# EAGLE board Arm Board V4 (EAGLE 6.5.0)
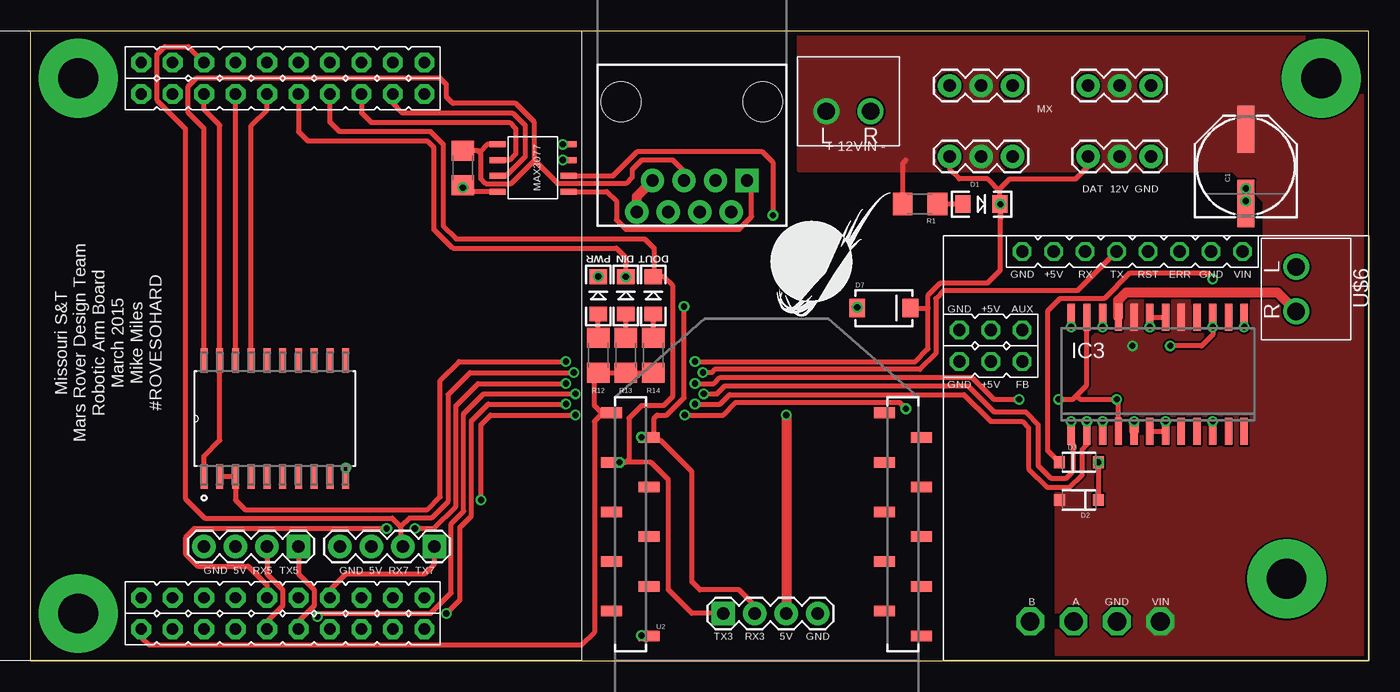
[diagram p0: board, top side]
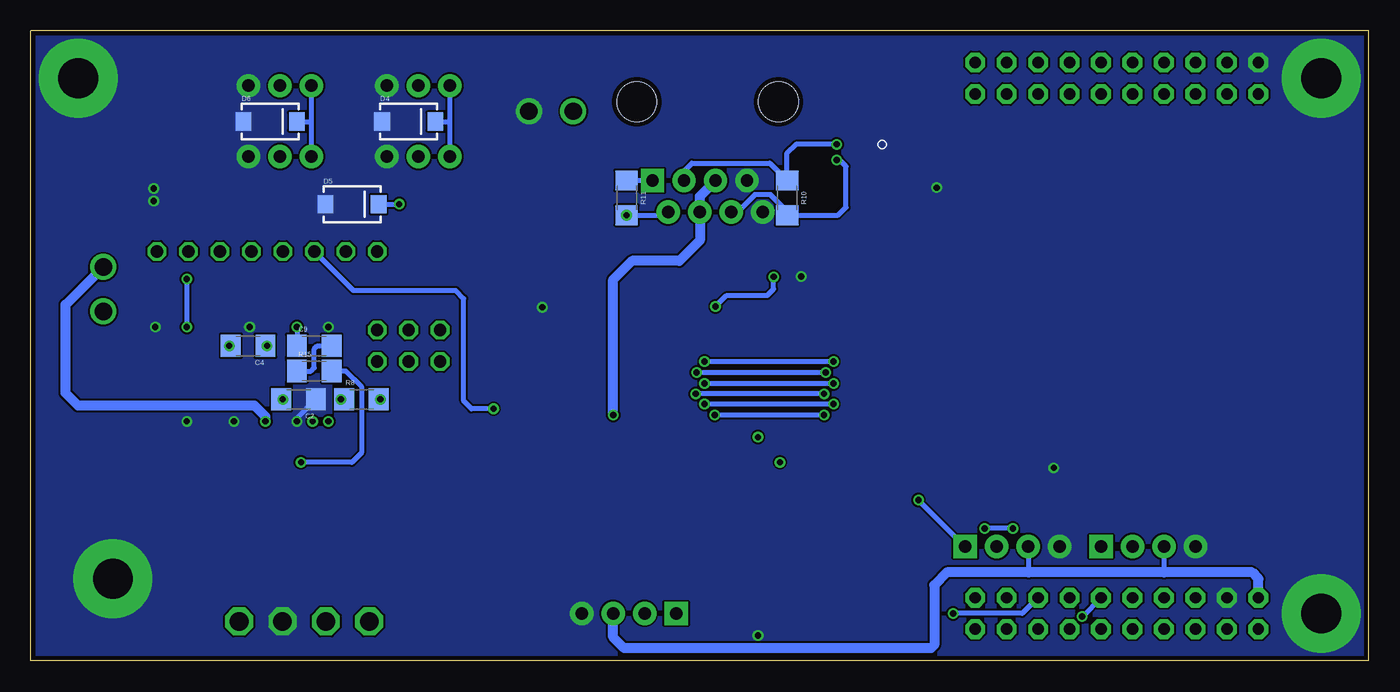
[diagram p1: board, bottom side, seen from below]

Size 107.95 x 50.8 mm. Coordinates in mm from the lower left corner, seen from the top.
Outline: 107.95,0 107.95,50.8 0,50.8 0,0 107.95,0
Copper layers (1*16): Top 0.0356mm / dielectric 1.5011mm / Bottom 0.0356mm
Design rules "LaenPCBOrder": minimum track width 6mil, minimum drill 13mil, track to track 6mil, track to pad 6mil, pad to pad 6mil, via to via 6mil, smd to smd 6mil, copper to edge 15mil, drill to drill 6mil, minimum pad ring 7mil, minimum via ring 7mil, stop-mask expansion 3mil, vias tented up to drill 0mil, thermal gap 10mil
Net classes: 1 USB: drill 0.406 mm, clearance 0.203 mm to class 0, clearance 0.406 mm; 3 usbvcc: width 0.61 mm, drill 0.508 mm, clearance 0.203 mm to class 0, clearance 0.254 mm
tRestrict: area 15.7,26.7 to 18.2,29.2

## Footprints (pad centres in the part's own frame; a part is rotated, then mirrored left to right if it is on the bottom)
PANASONIC_E = smd 3.8 x 1.4: + 3,0; - -3,0
1206 = smd 1.6 x 1.8: 1 -1.4,0; 2 1.4,0
LED-1206 = smd 1.2 x 1.4: A -1.5,0; C 1.5,0
SOD-123 = smd 0.9 x 0.95: A 1.575,0; C -1.575,0
SMA-DIODE = smd 1.27 x 1.47: A -2.15,0; C 2.15,0
SO24 = smd 0.6 x 2.2: 1 -6.985,-4.6; 2 -5.715,-4.6; 3 -4.445,-4.6; 4 -3.175,-4.6; 5 -1.905,-4.6; 6 -0.635,-4.6; 7 0.635,-4.6; 8 1.905,-4.6; 9 3.175,-4.6; 10 4.445,-4.6; 11 5.715,-4.6; 12 6.985,-4.6; 13 6.985,4.6; 14 5.715,4.6; 15 4.445,4.6; 16 3.175,4.6; 17 1.905,4.6; 18 0.635,4.6; 19 -0.635,4.6; 20 -1.905,4.6; 21 -3.175,4.6; 22 -4.445,4.6; 23 -5.715,4.6; 24 -6.985,4.6
1X04 = drill 1.016 pad 1.88 square: 1 0,0 | drill 1.016 pad 1.88: 2 2.54,0; 3 5.08,0; 4 7.62,0
DYNAMIXEL-1X03 = drill 1.016 pad 1.88: DDATA 5.08,0; GND 0,0; VIN 2.54,0
LAUNCHPAD-XL = drill 0.914 pad 1.6 octagon: 3.3V 30.48,2.54; GND1 33.02,5.08; GND2 30.48,48.26; PA2 53.34,48.26; PA3 50.8,48.26; PA4 48.26,48.26; PA5 48.26,2.54; PA6 50.8,2.54; PA7 53.34,2.54; PB0 35.56,2.54; PB1 38.1,2.54; PB2 33.02,48.26; PB3 35.56,45.72; PB4 45.72,2.54; PB5 33.02,2.54; PB6 45.72,48.26; PB7 43.18,48.26; PC4 38.1,45.72; PC5 40.64,45.72; PC6 43.18,45.72; PC7 45.72,45.72; PD0 35.56,5.08; PD1 38.1,5.08; PD2 40.64,5.08; PD3 43.18,5.08; PD6 48.26,45.72; PD7 50.8,45.72; PE0 35.56,48.26; PE1 45.72,5.08; PE2 48.26,5.08; PE3 50.8,5.08; PE4 40.64,2.54; PE5 43.18,2.54; PF0 38.1,48.26; PF1 53.34,5.08; PF2 30.48,45.72; PF3 33.02,45.72; PF4 53.34,45.72; RST 40.64,48.26; VBUS 30.48,5.08
STANDOFF-ELECTRICAL = drill 3.2 pad 6.35: P1 0,0
SOIC127P1030X265-20N = smd 1.981 x 0.559: 1 -4.674,5.715; 2 -4.674,4.445; 3 -4.674,3.175; 4 -4.674,1.905; 5 -4.674,0.635; 6 -4.674,-0.635; 7 -4.674,-1.905; 8 -4.674,-3.175; 9 -4.674,-4.445; 10 -4.674,-5.715; 11 4.674,-5.715; 12 4.674,-4.445; 13 4.674,-3.175; 14 4.674,-1.905; 15 4.674,-0.635; 16 4.674,0.635; 17 4.674,1.905; 18 4.674,3.175; 19 4.674,4.445; 20 4.674,5.715
XBEE-SMD = smd 1.7 x 0.85: 1 -12.5,20; 2 -9.5,18; 3 -12.5,16; 4 -9.5,14; 5 -12.5,12; 6 -9.5,10; 7 -12.5,8; 8 -9.5,6; 9 -12.5,4; 10 -9.5,2; 11 12.5,2; 12 9.5,4; 13 12.5,6; 14 9.5,8; 15 12.5,10; 16 9.5,12; 17 12.5,14; 18 9.5,16; 19 12.5,18; 20 9.5,20
TORXIS_BREAKOUT = drill 1 octagon: +5V@1 26.67,30.48; +5V@2 24.13,30.48; +5V_OUT 33.02,25.4; AUX 26.67,27.94; ERR 33.02,15.24; FB 24.13,27.94; GND@2 24.13,33.02; GND@3 26.67,33.02; GND@4 33.02,27.94; GND@5 33.02,12.7; RST 33.02,17.78; RX 33.02,22.86; TX 33.02,20.32; VIN_OUT 33.02,10.16 | drill 1.5 octagon: A 3.172,23.801; B 3.172,27.301; GND@1 3.172,20.301; VIN 3.172,16.801
RJ45-8 = drill 1 pad 1.88 square: 1 -4.445,6.35 | drill 1 pad 1.88: 2 -3.175,8.89; 3 -1.905,6.35; 4 -0.635,8.89; 5 0.635,6.35; 6 1.905,8.89; 7 3.175,6.35; 8 4.445,8.89 | hole 3.2: -5.715,0; 5.715,0
MAX3070E = smd 0.49 x 1.3: A -1.905,2.857; B -0.635,2.857; DI 0.635,-2.857; GND 1.905,-2.857; RO -0.635,-2.857; VCC -1.905,-2.857; Y 1.905,2.857; Z 0.635,2.857
691321100002 = drill 1.4: L -1.79,0; R 1.79,0

## Placement (x,y rotation side)
C1  330uF  [PANASONIC_E]  98.04,39.88 90 top
C2  5.6nF  [1206]  86.36,21.08 180 bottom
C4  220nF  [1206]  90.42,25.4 180 bottom
C9  10nF  [1206]  85.09,25.4 0 bottom
C12  .1uF  [1206]  34.86,39.75 270 top
D1  RED  [LED-1206]  76.71,36.83 0 top
D2  1N4148  [SOD-123]  84.58,12.95 180 top
D3  1N4148  [SOD-123]  84.58,16 0 top
D4  SMAJ5920  [SMA-DIODE]  77.47,43.5 0 bottom
D5  SMAJ5920  [SMA-DIODE]  82.04,36.83 0 bottom
D6  SMAJ5920  [SMA-DIODE]  88.65,43.5 0 bottom
D7  SMAJ5920  [SMA-DIODE]  68.83,28.45 0 top
IC3  L6206D  [SO24]  90.93,23.11 0 top
JP1  [1X04]  55.88,3.81 0 top
JP2  [1X04]  32.54,9.21 180 top
JP3  [1X04]  21.59,9.21 180 top
JP9  DYNAMIXEL-1X03  [DYNAMIXEL-1X03]  79.22,46.39 180 top
JP10  DYNAMIXEL-1X03  [DYNAMIXEL-1X03]  90.39,46.39 180 top
JP11  DYNAMIXEL-1X03  [DYNAMIXEL-1X03]  79.22,40.67 180 top
JP12  DYNAMIXEL-1X03  [DYNAMIXEL-1X03]  90.39,40.67 180 top
LED1  RED  [LED-1206]  45.78,29.46 90 top
LED2  RED  [LED-1206]  48.01,29.46 90 top
LED3  GREEN  [LED-1206]  50.23,29.46 90 top
P1  STELLARIS-LAUNCHPADSTELLARIS-LAUNCHPAD-XL  [LAUNCHPAD-XL]  -21.59,0 0 top
R1  1k  [1206]  71.75,36.83 180 top
R8  100k  [1206]  81.28,21.08 0 bottom
R10  120 Ohm  [1206]  46.93,37.34 270 bottom
R11  120 Ohm  [1206]  59.88,37.34 90 bottom
R12  1k  [1206]  45.78,24.64 270 top
R13  1k  [1206]  48.01,24.64 90 top
R14  1k  [1206]  50.23,24.64 90 top
R15  100  [1206]  85.09,23.37 0 bottom
S1  STANDOFF_ELECTRICAL  [STANDOFF-ELECTRICAL]  3.81,3.81 0 top
S2  STANDOFF_ELECTRICAL  [STANDOFF-ELECTRICAL]  3.81,46.99 0 top
S3  STANDOFF_ELECTRICAL  [STANDOFF-ELECTRICAL]  101.35,6.6 0 bottom
S4  STANDOFF_ELECTRICAL  [STANDOFF-ELECTRICAL]  104.14,46.99 0 top
U1  SN74LS241DW  [SOIC127P1030X265-20N]  19.68,19.53 90 top
U2  XBEE-1B3  [XBEE-SMD]  59.37,0 0 top
U$1  TORXIS_BREAKOUT  [TORXIS_BREAKOUT]  107.95,0 90 top
U$3  RJ45-8PTH  [RJ45-8]  53.34,45.09 180 top
U$4  MAX3077  [MAX3070E]  40.51,39.75 270 top
U$6  H_WR-TBL_321*0002VERT  [691321100002]  102.11,29.97 270 top
U$7  H_WR-TBL_321*0002VERT  [691321100002]  65.98,44.32 0 top

## Library data of the parts
C1 C12 = SparkFun-Capacitors
C2 C4 C9 R10-R14 = SparkFun-Passives
D1 LED1 LED2 = SparkFun-LED
D2 D3 = SparkFun-DiscreteSemi
D4-D7 = SparkFun-DiscreteSemi; PROD_ID: DIO-08053
IC3 = L6206D
JP1-JP3 = SparkFun-Connectors
JP9-JP12 U$1 = MRDT-2015-Arm
LED3 = SparkFun-LED; PROD_ID: DIO-00862
P1 = StellarisLaunchPad_Fred
R1 R8 R15 = SparkFun-Resistors
S1-S4 = SparkFun-Electromechanical
U1 = 74LS241; MPN: SN74LS241DW; OC_FARNELL: 1739687; OC_NEWARK: 50R6539; PACKAGE: SOIC-20; SUPPLIER: Texas Instruments
U2 = SparkFun
U$3 = SparkFun-Connectors; PROD_ID: CONN-08506; VALUE: RJ45
U$4 = MAX3077
U$6 U$7 = MRDT-2015-PowerBoard; DIGIKEY_PN: 732-2763-ND

## Nets
+3V3: P1.3.3V R12.2 R13.1 R14.1 U2.1
+5V: C12.1 JP1.3 JP2.3 JP3.3 P1.VBUS U1.20 U$3.4 U$3.5 U$4.VCC
+12V: C1.+ C4.1 D2.A IC3.17 IC3.20 JP9.VIN JP10.VIN JP11.VIN JP12.VIN R1.2 U$1.VIN U$7.L
A1: IC3.5 U$6.L
A2: IC3.21 U$6.R
CTS: U2.12
DC_1: P1.PB3 U1.1 U1.19
DDATA_1: D1.C D4.C D5.C D6.C D7.C JP9.DDATA JP10.DDATA JP11.DDATA JP12.DDATA U1.2 U1.3
DIO0: U2.20
DIO1: U2.19
DIO2: U2.18
DIO3: U2.17
DIO4: U2.11
DIO5: U2.15
DIO9: U2.13
DIO11: U2.7
DIO12: U2.4
DTR: U2.9
EN_A: P1.PD2 R8.2
GND: C1.- C2.1 C12.2 D4.A D5.A D6.A D7.A IC3.3 IC3.6 IC3.7 IC3.10 IC3.13 IC3.18 IC3.19 IC3.24 JP1.4 JP2.4 JP3.4 JP9.GND JP10.GND JP11.GND JP12.GND LED1.C P1.GND1 P1.GND2 S1.P1 S2.P1 S3.P1 S4.P1 U1.10 U2.10 U$1.GND@1 U$3.7 U$3.8 U$4.GND U$7.R
IN1_A: IC3.1 P1.PD3
IN2_A: IC3.2 P1.PE2
INT1_XM: P1.PB1
INT2_XM: P1.PB0
INT_G: P1.PB5
LA_ENC: P1.PE3
N$4: LED2.A R13.2
N$6: LED3.A R14.2
N$13: D1.A R1.1
N$17: D2.C D3.A R15.2
N$18: C9.2 R15.1
N$19: C9.1 IC3.22
N$38: LED1.A R12.1
OCD_A: C2.2 IC3.4 IC3.23 R8.1
RES1: U2.8
RES2: U2.14
RSSI: U2.6
RST: P1.RST
RTS: U2.16
RX+: R10.1 U$3.3 U$4.A
RX-: R10.2 U$3.6 U$4.B
RX_1: P1.PC4 U1.18
RX_2: P1.PD6 U$4.RO
RX_3: JP1.2 LED2.C P1.PC6 U2.2
RX_5: JP3.2 P1.PE4
RX_7: JP2.2 P1.PE0 U$1.TX
SCL: P1.PA6
SDA: P1.PA7
TX+: R11.2 U$3.1 U$4.Y
TX-: R11.1 U$3.2 U$4.Z
TX_1: P1.PC5 U1.17
TX_2: P1.PD7 U$4.DI
TX_3: JP1.1 LED3.C P1.PC7 U2.3
TX_5: JP3.1 P1.PE5
TX_7: JP2.1 P1.PE1 U$1.RX
VBOOT: C4.2 D3.C IC3.15
XRESET: U2.5

## Tracks (layer width: path | path; a pad name or v marks a point on that pad's centre or on a via)
+3V3
  Top 0.406: R14.1 R13.1 R12.2 45.47,22.92 45.47,20.57 46.04,20 46.16,20 | P1.3.3V 8.89,1.91 9.53,1.27 44.45,1.27 45.47,2.29 45.47,19.3 46.16,20 | U2.1 46.16,20
+5V  (via drill 0.5)
  Top 0.406: U1.20 13.97,42.93 12.7,44.2 12.7,46.35 13.34,46.99 33.02,46.99 33.53,46.48 33.53,45.47 34.04,44.96 39.12,44.96 40.64,43.43 40.64,40.39 | U$4.VCC 36.83,41.66 36.2,41.02 | 36.2,41.02 36.32,40.89 36.32,38.86 36.7,38.48 38.73,38.48 40.64,40.39 | 36.2,41.02 36.07,41.15 C12.1 | 40.64,40.39 42.55,38.48 48.01,38.48 48.51,38.99 48.51,39.62 49.28,40.39 51.82,40.39 52.7,39.5 U$3.5
  Top 0.813: v60.96,19.81 JP1.3
  Bottom 0.406: JP3.3 16.51,7.11 | 27.43,7.11 27.46,7.14 JP2.3 27.43,9.18 | 27.43,9.24 27.43,9.18 | 27.43,9.14 27.43,9.18
  Bottom 0.813: P1.VBUS 8.89,6.6 9.4,7.11 16.51,7.11 27.43,7.11 34.04,7.11 35.05,6.1 35.05,1.27 35.31,1.02 60.07,1.02 60.96,1.91 JP1.3 | v60.96,19.81 60.96,30.73 59.44,32.26 55.63,32.26 53.98,33.91 U$3.4 53.98,37.47 U$3.5
+12V  (via drill 0.5)
  Top 0.406: R1.2 70.36,40.13 70.61,40.39
  Bottom 0.406: C4.1 v88.9,25.4
  pour Top (no thermals): 107.95,0 107.95,50.8 61.98,50.8 61.98,39.62 97.03,39.62 99.57,37.08 99.57,28.96 88.65,28.96 82.8,23.11 82.8,0.51
A1  (via drill 0.5)
  Top 0.813: v89.03,19.3 IC3.5
  Bottom 0.813: 105.16,28.7 105.16,21.59 104.14,20.57 89.92,20.57 89.03,19.68 v89.03,19.3 | 105.16,28.7 105.16,28.71 | U$6.L 105.16,28.7
A2
  Top 0.813: IC3.21 87.76,29.08 88.39,29.72 100.58,29.72 | 100.58,29.72 100.6,29.72 | U$6.R 102.11,28.19 100.58,29.72
DC_1
  Top 0.406: U1.1 13.97,16.51 15.24,17.78 U1.19 15.24,43.18 13.97,44.45 P1.PB3
DDATA_1  (via drill 0.5)
  Top 0.406: 16.39,14.85 16.51,14.73 16.51,12.95 17.27,12.19 32,12.19 33.02,13.21 33.02,22.61 34.54,24.13 v43.18,24.13 | v53.59,24.13 71.37,24.13 72.39,25.15 72.39,28.45 | 16.39,14.85 U1.3 | 16.39,14.85 U1.2 | 78.21,37.87 D1.C 78.23,37.31 v78.23,36.83 | 78.21,37.87 77.22,38.86 74.93,38.86 74.17,39.62 74.17,40.64 JP11.DDATA | 78.21,37.87 78.21,38.08 78.99,38.86 84.33,38.86 85.34,39.88 85.34,40.64 JP12.DDATA | 72.39,28.45 72.39,29.46 73.41,30.48 77.22,30.48 78.23,31.5 v78.23,36.83 | D7.C 72.39,28.45 | v78.23,36.83 78.23,35.56
  Bottom 0.406: v43.18,24.13 v53.59,24.13 | JP11.DDATA 74.14,43.5 | 74.14,43.5 JP9.DDATA | JP12.DDATA 85.31,43.5 | 85.31,43.5 JP10.DDATA | D4.C 74.14,43.5 | D6.C 85.31,43.5 | D5.C v78.23,36.83
EN_A  (via drill 0.5)
  Top 0.406: 19.05,5.33 P1.PD2 19.05,6.1 17.53,7.62 13.46,7.62 12.45,8.64 12.45,9.91 13.21,10.67 v28.7,10.67 | v30.99,10.67 32.51,10.67 34.29,12.45 34.29,20.57 36.07,22.35 v43.18,22.35 | v53.59,22.35 55.12,22.35 55.63,22.86 75.95,22.86 77.72,21.08 v79.76,21.08
  Bottom 0.406: v28.7,10.67 v30.99,10.67 | v43.18,22.35 v53.59,22.35 | R8.2 v79.76,21.08
GND  (via drill 0.5)
  Top 0.406: 50.01,2 U2.10 49.9,2.03 v49.28,2.03 | U$4.GND 35.37,37.85 C12.2 v34.86,38.16 | v25.4,15.56 U1.10 | IC3.6 IC3.7 v91.57,19.3 91.57,19.43 | IC3.3 v86.49,19.3 | v97.92,26.92 IC3.13 | IC3.24 v83.95,26.92 | LED1.C v45.78,30.99 | v90.3,26.92 IC3.19 IC3.18 | IC3.10 v95.38,19.3 | C1.- v98.04,38.1 | D7.A v66.67,28.51
  Top 0.813: U$3.8 48.9,37.47 U$3.7
  Bottom 0.406: v86.49,19.3 86.49,19.55 C2.1
  other vias: 98.04,37.08
  pour Bottom (no thermals): 0,7.3 0,0 7.62,0 7.62,7.3
  pour Bottom (no thermals): 0,50.8 0,43.5 7.62,43.5 7.62,50.8
  pour Bottom (no thermals): 100.65,50.8 100.65,43.5 107.95,43.5 107.95,50.8
  pour Bottom (no thermals): 0,0 107.95,0 107.95,50.8 0,50.8
IN1_A  (via drill 0.5)
  Top 0.406: v23.11,3.56 23.37,3.81 32.26,3.81 33.91,5.46 33.91,11.05 34.92,12.06 34.92,19.94 36.51,21.53 v43.94,21.53 | v54.29,21.53 55.37,21.53 56.01,22.16 75.63,22.16 77.72,20.07 80.33,20.07 80.33,20 81.28,19.05 81.28,15.75 82.3,14.73 83.57,14.73 84.07,15.24 84.07,17.53 83.95,17.65 IC3.1 v83.95,19.3
  Bottom 0.406: P1.PD3 v23.11,3.56 | v43.94,21.53 v54.29,21.53
IN2_A  (via drill 0.5)
  Top 0.406: v43.18,20.7 36.89,20.7 35.56,19.37 35.56,11.68 34.61,10.73 34.61,4.89 v33.53,3.81 | v53.59,20.7 55.63,20.7 56.39,21.46 75.31,21.46 77.47,19.3 80.01,19.3 80.52,18.8 80.52,15.49 82.04,13.97 83.82,13.97 84.84,14.99 84.84,17.02 85.22,17.4 IC3.2 v85.22,19.3
  Bottom 0.406: P1.PE2 27.94,3.81 v33.53,3.81 | v43.18,20.7 v53.59,20.7
N$4
  Top 0.406: R13.2 LED2.A
N$6
  Top 0.406: R14.2 LED3.A
N$13
  Top 0.406: D1.A R1.1
N$17  (via drill 0.5)
  Top 0.406: D3.A D2.C
  Bottom 0.406: R15.2 82.55,23.37 81.28,22.1 81.28,16.76 82.04,16 D3.A
  other vias: 86.16,16
N$18
  Bottom 0.406: R15.1 85.34,23.37 85.09,23.62 85.09,25.15 84.84,25.4 C9.2
N$19  (via drill 0.5)
  Top 0.406: IC3.22 v86.49,26.92
  Bottom 0.406: v86.49,26.92 C9.1
N$38
  Top 0.406: R12.1 LED1.A
OCD_A  (via drill 0.5)  (1 unrouted)
  Top 0.406: 84.39,21.4 84.07,21.08 v82.93,21.08 | 84.39,21.4 85.22,22.23 IC3.23 | 84.39,21.4 84.71,21.08 v87.63,21.08 C2.2 IC3.4
  Bottom 0.406: R8.1 v82.93,21.08
RX+  (via drill 0.5)
  Top 0.406: U$4.A v42.93,41.66
  Bottom 0.406: U$3.3 55.24,39.5 54.61,40.13 48.32,40.13 R10.1 46.93,40.96 46.23,41.66 v42.93,41.66
RX-  (via drill 0.5)
  Top 0.406: v42.93,40.39 U$4.B
  Bottom 0.406: v42.93,40.39 42.67,40.39 42.16,39.88 42.16,36.58 42.8,35.94 R10.2 46.93,36.26 48.26,37.59 49.53,37.59 50.93,36.2 U$3.6
RX_1
  Top 0.406: U1.18 P1.PC4
RX_2
  Top 0.406: P1.PD6 26.67,44.2 27.43,43.43 38.61,43.43 39.12,42.93 39.12,40.89 38.61,40.39 U$4.RO
RX_3  (via drill 0.5)
  Top 0.406: JP1.2 58.42,4.45 57.15,5.71 53.98,5.71 53.34,6.35 53.34,15.24 50.8,17.78 50.09,17.78 U2.2 49.65,17.78 49.53,17.78 v49.28,18.03 | P1.PC6 21.59,42.67 22.35,41.91 32,41.91 32.51,41.4 32.51,34.8 34.04,33.27 47.24,33.27 48.01,32.51 48.01,32 LED2.C | 49.78,18.03 v49.28,18.03 | v49.28,18.03 50.29,18.03 50.29,19.56 50.55,19.81 51.31,19.81 52.7,21.21 v52.7,28.57
  Bottom 0.406: v52.7,28.57 51.82,29.46 48.51,29.46 48.01,29.97 LED2.C
  other vias: 48.01,30.96
RX_5
  Top 0.406: JP3.2 19.05,6.99 20.32,5.71 20.32,4.45 19.05,3.17 P1.PE4
RX_7  (via drill 0.5)
  Top 0.406: 29.84,10.79 30.54,11.49 32.32,11.49 33.66,12.83 33.66,21.46 35.43,23.24 v43.81,23.24 | 29.84,10.79 29.84,9.37 JP2.2 | v54.23,23.24 54.93,23.24 55.18,23.5 71.75,23.5 73.03,24.77 73.03,29.21 73.66,29.84 84.45,29.84 U$1.TX | P1.PE0 12.7,49.53 10.79,49.53 10.16,48.9 10.16,45.21 12.45,42.93 12.45,13.08 14.03,11.49 29.15,11.49 29.84,10.79
  Bottom 0.406: v43.81,23.24 v54.23,23.24
TX+
  Top 0.406: U$4.Y 46.48,37.85 47.24,37.08 47.24,35.56 48.01,34.8 57.15,34.8 58.17,35.81 58.17,38.35 U$3.1
  Bottom 0.406: R11.2 U$3.1
TX-  (via drill 0.5)
  Top 0.406: U$4.Z 46.99,39.12 48.96,41.08 58.99,41.08 59.88,40.2 R11.1
  Bottom 0.406: R11.1 56.77,35.94 U$3.2
  other vias: 59.88,35.94
TX_1
  Top 0.406: P1.PC5 19.05,44.45 17.78,43.18 U1.17
TX_2
  Top 0.406: U$4.DI 38.35,39.12 39.88,40.64 39.88,43.18 38.86,44.2 29.97,44.2 29.21,44.96 P1.PD7
TX_3  (via drill 0.5)
  Top 0.406: JP1.1 53.34,3.81 51.44,5.71 51.44,14.61 50.04,16 48.01,16 | P1.PC7 24.13,43.43 24.89,42.67 32.26,42.67 33.27,41.66 33.27,35.05 34.29,34.04 49.53,34.04 50.29,33.27 50.29,31.03 LED3.C 50.25,30.99 51.05,30.99 51.82,30.23 51.82,21.34 51.05,20.57 49.28,20.57 48.26,19.56 48.26,16.25 48.01,16 | v47.5,16 U2.3 46.48,16 v47.5,16 | 48.01,16 v47.5,16
TX_5
  Top 0.406: JP3.1 21.59,6.99 22.86,5.71 22.86,4.45 21.59,3.17 P1.PE5
TX_7  (via drill 0.5)
  Top 0.406: JP2.1 32.54,7.78 31.75,6.99 25.4,6.99 24.13,5.71 P1.PE1 | v52.77,19.81 55.88,19.81 56.9,20.83 70.1,20.83 v70.61,20.32 | v36.32,12.95 36.32,19.05 37.08,19.81 v43.94,19.81
  Bottom 0.406: JP2.1 32.58,9.21 v36.32,12.95 | v43.94,19.81 v52.77,19.81 | v70.61,20.32 72.39,20.32 73.03,20.95 73.03,29.21 73.66,29.84 81.92,29.84 U$1.RX
VBOOT  (via drill 0.5)
  Top 0.406: IC3.15 v95.38,26.92 95.38,26.29 94.49,25.4 v91.95,25.4 | D3.C 82.04,16.97 82.04,28.19 83.06,29.21 86.61,29.21 88.65,31.24 95,31.24 95,31.18 v95.38,30.8
  Bottom 0.406: v91.95,25.4 C4.2 | v95.38,30.8 v95.38,26.92

## Text on the board
tPlace: MX | + 12VIN - | DAT 12V GND | PWR | DIN | DOUT | Missouri S&T / Mars Rover Design Team / Robotic Arm Board / March 2015 / Mike Miles / #ROVESOHARD | GND 5V RX5 TX5 | GND 5V RX7 TX7 | TX3 | RX3 | 5V | GND